# EAGLE board schematicamitfix_layout2 (EAGLE 8.4.1)
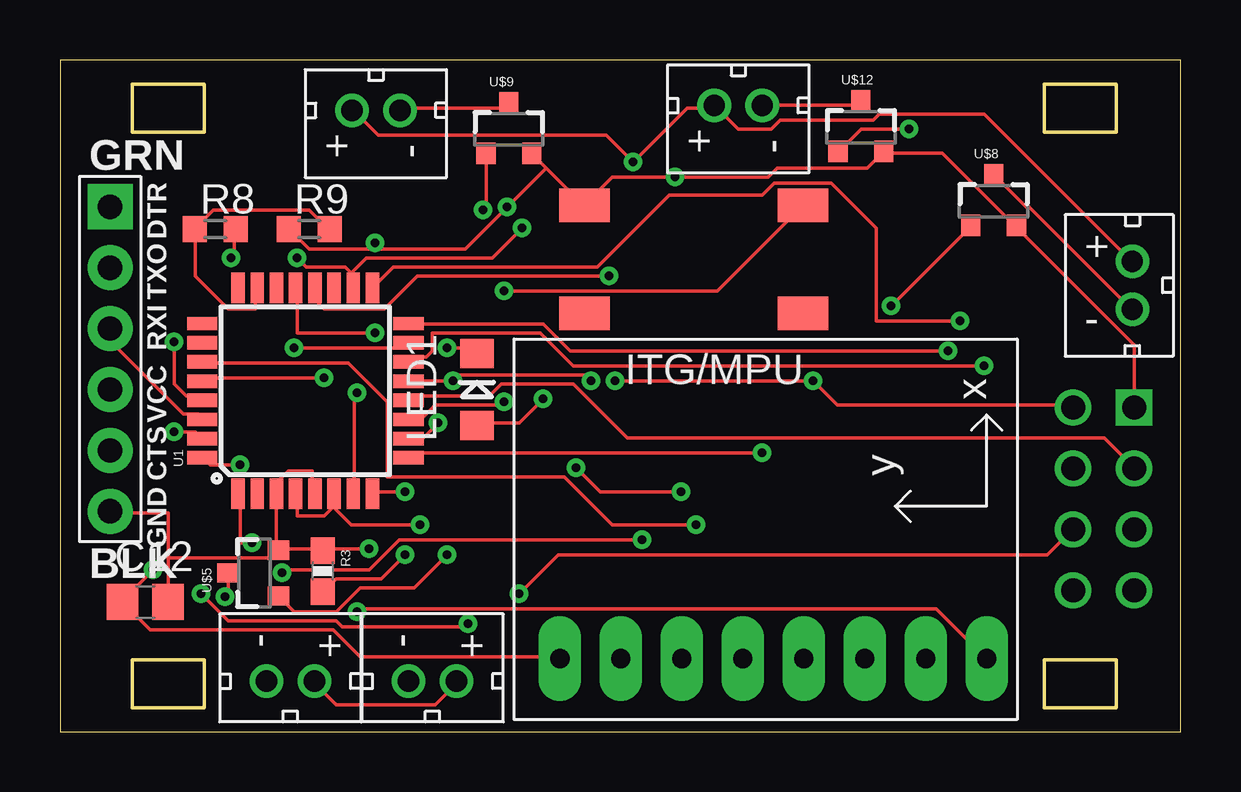
[diagram p0: board, top side]
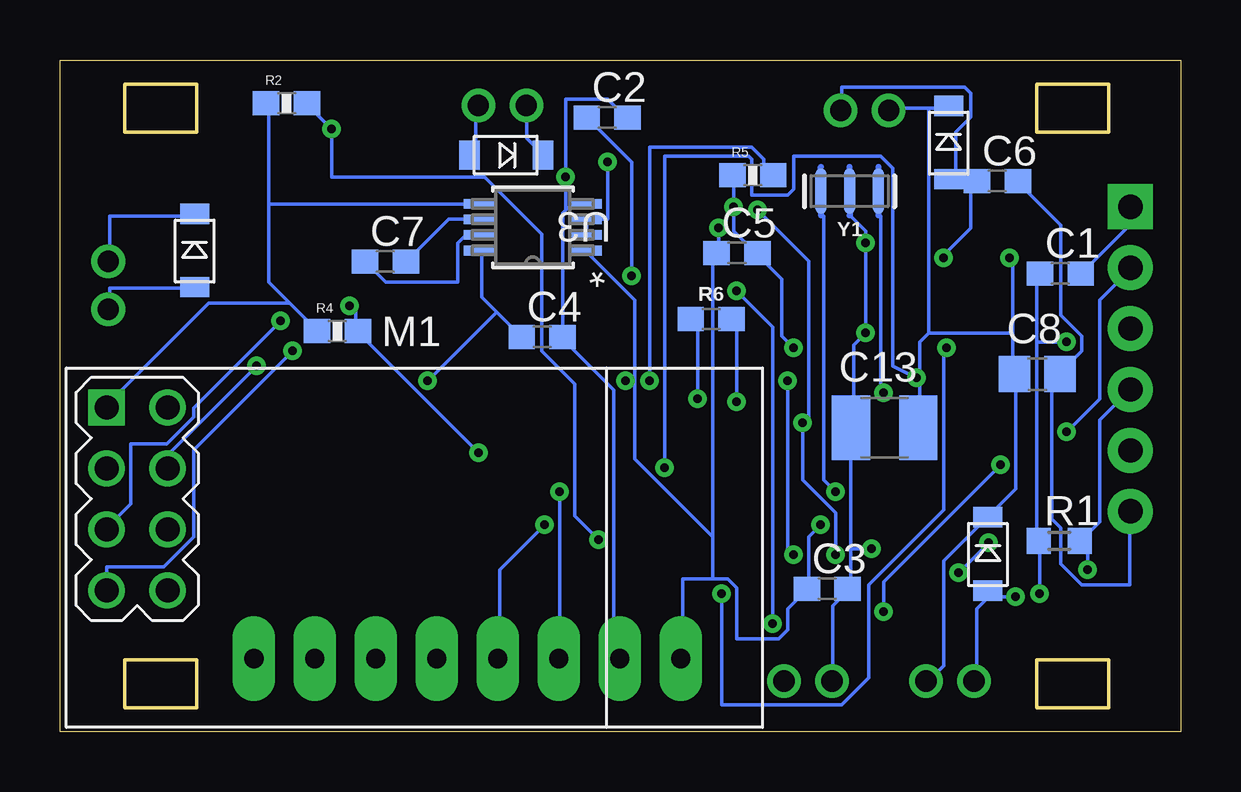
[diagram p1: board, bottom side, seen from below]

Size 46.69 x 28 mm. Coordinates in mm from the lower left corner, seen from the top.
Outline: 0,0 46.69,0 46.69,28 0,28 0,0
Outline: 3,1 3,3 6,3 6,1 3,1
Outline: 3,27 6,27 6,25 3,25 3,27
Outline: 44,1 41,1 41,3 44,3 44,1
Outline: 44,27 41,27 41,25 44,25 44,27
Copper layers (1*16): Top 0.035mm / dielectric 1.5mm / Bottom 0.035mm
Design rules "default": minimum track width 6mil, minimum drill 0.35mm, track to track 6mil, track to pad 6mil, pad to pad 6mil, via to via 6mil, smd to smd 6mil, copper to edge 40mil, drill to drill 6mil, minimum pad ring 10mil, minimum via ring 8mil, stop-mask expansion 4mil, vias tented up to drill 0mil, thermal gap 10mil

## Footprints (pad centres in the part's own frame; a part is rotated, then mirrored left to right if it is on the bottom)
C0603 = smd 1.1 x 1: 1 -0.85,0; 2 0.85,0
C0805 = smd 1.3 x 1.5: 1 -0.95,0; 2 0.95,0
C1210 = smd 1.6 x 2.7: 1 -1.4,0; 2 1.4,0
FTDI_DEVICE_SIDE = drill 1.016 pad 1.88 square: P$1 -6.35,0 | drill 1.016 pad 1.88: P$2 -3.81,0; P$3 -1.27,0; P$4 1.27,0; P$5 3.81,0; P$6 6.35,0
LED-1206 = smd 1.2 x 1.4: A -1.5,0; C 1.5,0
WIRELESS-NRF24L01 = drill 1 square: 1 -12.7,6.35 | drill 1: 2 -10.16,6.35; 3 -12.7,3.81; 4 -10.16,3.81; 5 -12.7,1.27; 6 -10.16,1.27; 7 -12.7,-1.27; 8 -10.16,-1.27
R0603 = smd 1 x 1.1: 1 -0.85,0; 2 0.85,0
0603-RES = smd 1.1 x 1: 1 -0.85,0; 2 0.85,0
0603 = smd 1.1 x 1: 1 -0.85,0; 2 0.85,0
TQFP32-08 = smd 1.27 x 0.559: 1 -4.293,2.8; 2 -4.293,2; 3 -4.293,1.2; 4 -4.293,0.4; 5 -4.293,-0.4; 6 -4.293,-1.2; 7 -4.293,-2; 8 -4.293,-2.8; 17 4.293,-2.8; 18 4.293,-2; 19 4.293,-1.2; 20 4.293,-0.4; 21 4.293,0.4; 22 4.293,1.2; 23 4.293,2; 24 4.293,2.8 | smd 0.559 x 1.27: 9 -2.8,-4.293; 10 -2,-4.293; 11 -1.2,-4.293; 12 -0.4,-4.293; 13 0.4,-4.293; 14 1.2,-4.293; 15 2,-4.293; 16 2.8,-4.293; 25 2.8,4.293; 26 2,4.293; 27 1.2,4.293; 28 0.4,4.293; 29 -0.4,4.293; 30 -1.2,4.293; 31 -2,4.293; 32 -2.8,4.293
GY-521 = drill 0.8 pad 1.778 long: ADO -8.89,-6.35; GND -8.89,6.35; INT -8.89,-8.89; SCL -8.89,3.81; SDA -8.89,1.27; VCC -8.89,8.89; XCL -8.89,-3.81; XDA -8.89,-1.27
21-0036K = smd 1.372 x 0.406: 1 -2.184,0.975; 2 -2.184,0.325; 3 -2.184,-0.325; 4 -2.184,-0.975; 5 2.184,-0.975; 6 2.184,-0.325; 7 2.184,0.325; 8 2.184,0.975
LL3301NF065QG = smd 2.1 x 1.4: 1 0,0; 2 0,-4.5; 3 9.1,0; 4 9.1,-4.5
JST_CONNECTOR_FEMALE = drill 0.889: + 0,1; - 0,-1
MINI2-F3-B = smd 1.22 x 0.85: NEG 0,1.55; POS 0,-1.5
SOT23-3 = smd 0.8 x 0.9: 1 -0.95,-1; 2 0.95,-1; 3 0,1.1
RESONATOR-SMD-3.2X1.3 = smd 0.45 x 1.905: 1 -1.2,0; 2 0,0; 3 1.2,0

## Placement (x,y rotation side)
C1  100nF  [C0603]  5.01,19.1 0 bottom
C2  100nF  [C0603]  23.89,25.6 0 bottom
C3  100nF  [C0603]  14.72,5.95 0 bottom
C4  100nF  [C0603]  26.6,16.45 0 bottom
C5  100nF  [C0603]  18.48,19.95 0 bottom
C6  10uF  [C0603]  7.63,22.95 0 bottom
C7  0.22uF  [C0603]  33.13,19.6 0 bottom
C8  1uF  [C0805]  5.97,14.9 0 bottom
C12  1uF  [C0805]  3.55,5.4 0 top
C13  100uF  [C1210]  12.33,12.67 0 bottom
J1  FTDI_DEVICE  [FTDI_DEVICE_SIDE]  2.09,15.53 270 top
LED1  [LED-1206]  17.37,14.26 90 top
M1  WIRELESS-NRF24L01  [WIRELESS-NRF24L01]  32.05,7.16 0 bottom
R1  10k  [R0603]  5.05,7.95 0 bottom
R2  10k  [0603-RES]  37.25,26.19 0 bottom
R3  10k  [0603-RES]  10.94,6.69 270 top
R4  10k  [0603-RES]  35.13,16.69 0 bottom
R5  10k  [0603-RES]  17.82,23.19 0 bottom
R6  220  [0603]  19.56,17.19 0 bottom
R8  10k  [R0603]  6.47,20.95 0 top
R9  10k  [R0603]  10.39,20.95 0 top
U1  ATMEGA328P_TQFP  [TQFP32-08]  10.22,14.21 90 top
U2  GY-521MPU6050  [GY-521]  29.72,11.93 90 top
U3  MAX1595EUA33+  [21-0036K]  26.99,21.03 180 bottom
U$1  LL3301NF065QG  [LL3301NF065QG]  21.86,21.94 0 top
U$3  JST_CONNECTOR_FEMALE  [JST_CONNECTOR_FEMALE]  13.16,25.9 90 top
U$4  DB2W40300L  [MINI2-F3-B]  9.66,24.53 0 bottom
U$5  N-CHANNEL-MOSFET-IRLML6244TRPBF  [SOT23-3]  8.1,6.61 90 top
U$6  DB2W40300L  [MINI2-F3-B]  28.12,24.03 270 bottom
U$7  JST_CONNECTOR_FEMALE  [JST_CONNECTOR_FEMALE]  28.26,26.1 90 top
U$8  N-CHANNEL-MOSFET-IRLML6244TRPBF  [SOT23-3]  38.9,22.11 0 top
U$9  N-CHANNEL-MOSFET-IRLML6244TRPBF  [SOT23-3]  18.7,25.11 0 top
U$10  DB2W40300L  [MINI2-F3-B]  41.08,20.03 0 bottom
U$11  JST_CONNECTOR_FEMALE  [JST_CONNECTOR_FEMALE]  44.68,18.6 0 top
U$12  N-CHANNEL-MOSFET-IRLML6244TRPBF  [SOT23-3]  33.37,25.19 0 top
U$14  DB2W40300L  [MINI2-F3-B]  8.03,7.38 0 bottom
U$15  JST_CONNECTOR_FEMALE  [JST_CONNECTOR_FEMALE]  9.6,2.1 270 top
U$19  JST_CONNECTOR_FEMALE  [JST_CONNECTOR_FEMALE]  15.52,2.1 270 top
Y1  8MHz  [RESONATOR-SMD-3.2X1.3]  13.79,22.53 180 bottom

## Library data of the parts
C1-C8 C12 C13 = rcl; SPICEPREFIX: C
J1 M1 U2 U$3 U$4 U$6 U$7 U$10 U$11 U$14 U$15 U$19 = quad
LED1 = LilyPad-Wearables
R1 R8 R9 = rcl; SPICEPREFIX: R
R2-R5 = SparkFun-Resistors
R6 = SparkFun-Resistors; PROD_ID: RES-07861
U1 = quad; PROD_ID: IC-09069
U3 = MAX1595EUA33+; MANUFACTURER_PART_NUMBER: MAX1595EUA33+; VENDOR: Maxim Integrated Products
U$1 = E-Switch
U$5 U$8 U$9 U$12 = quad; DATASHEET: http://www.mouser.com/ds/2/196/irlml6244pbf-936666.pdf; MOUSER: 942-IRLML6244TRPBF; URL: http://www.mouser.com/Search/ProductDetail.aspx?R=IRLML6244TRPBFvirtualkey57370000virtualkey942-IRLML6244TRPBF
Y1 = SparkFun-Clocks; PROD_ID: XTAL-08895

## Nets
AIN: R8.1 R9.2 U1.23
FTDI_DTR: C1.2 J1.P$1
FTDI_RX: J1.P$3 U1.30
FTDI_TX: J1.P$2 U1.31
GND: C2.2 C3.2 C4.2 C5.2 C6.2 C8.2 C12.2 C13.1 J1.P$6 LED1.C M1.1 R2.1 R3.1 R4.1 R5.1 R9.1 U1.3 U1.5 U1.21 U2.GND U3.4 U3.5 U$1.1 U$5.2 U$8.2 U$9.2 U$12.2 U$19.- Y1.2
IMU_INT: U1.32 U2.INT
IMU_SCL: U1.28 U2.SCL
IMU_SDA: U1.27 U2.SDA
N$1: C1.1 R1.1 U1.29 U$1.3
N$2: C2.1 U1.20
N$5: U$3.- U$4.POS U$9.3
N$6: C7.1 U3.7
N$7: R6.2 U1.11
N$9: U$6.POS U$7.- U$12.3
N$10: C7.2 U3.6
N$11: LED1.A R6.1
N$13: U$8.3 U$10.POS U$11.-
N$17: U$5.3 U$14.POS U$15.-
NRF_CE: M1.3 U1.12
NRF_CSN: M1.4 U1.14
NRF_MISO: M1.7 U1.16
NRF_MOSI: M1.6 U1.15
NRF_SCK: M1.5 U1.17
PWM1: R2.2 U1.1 U$12.1
PWM2: R3.2 U1.10 U$9.1
PWM3: R4.2 U1.9 U$8.1
PWM4: R5.2 U1.13 U$5.1
VCC: C3.1 C4.1 C5.1 C6.1 C12.1 J1.P$4 M1.2 R1.2 U1.4 U1.6 U1.18 U2.VCC U3.1 U3.8
VIN: C8.1 C13.2 R8.2 U3.2 U3.3 U$3.+ U$4.NEG U$6.NEG U$7.+ U$10.NEG U$11.+ U$14.NEG U$15.+ U$19.+
XTAL1: U1.7 Y1.1
XTAL2: U1.8 Y1.3

## Tracks (layer width: path | path; a pad name or v marks a point on that pad's centre or on a via)
AIN
  Top 0.152: R9.2 11.12,21 10.38,21.75 6.38,21.75 5.62,21 R8.1 5.62,20.88 5.62,19 7,17.62 8.12,17.62 8.12,18.5 U1.23
FTDI_DTR
  Bottom 0.152: C1.2 4.12,19.12 2.12,21.12 2.12,21.88 J1.P$1
FTDI_RX
  Top 0.152: U1.30 5.88,13.12 5.75,13.25 5.12,13.25 2.12,16.25 2.12,16.75 J1.P$3
FTDI_TX  (via drill 0.35)
  Top 0.152: v4.75,12.5 5.62,12.5 5.88,12.25 U1.31
  Bottom 0.152: v4.75,12.5 3.38,13.88 3.38,18 2.12,19.25 J1.P$2
GND  (via drill 0.35)
  Top 0.152: U$5.2 9.12,7.62 10.88,7.62 R3.1 11,7.62 v12.88,7.62 | U$5.2 9,7.62 9,9.88 U1.3 9.12,10 9.12,10.5 9.5,10.88 10.5,10.88 10.5,10 U1.5 | 4.5,7.25 4.5,9.12 2.12,9.12 J1.P$6 | 4.5,7.25 C12.2 | 4.5,7.25 8.75,7.25 9,7.5 U$5.2 | v13.12,16.62 9.88,16.62 9.88,18.5 U1.21 | v16.12,16 17.12,16 17.25,15.88 LED1.C | 20.25,23.5 21.75,22 U$1.1 21.88,22 23,23.12 v25.62,23.12 29.5,23.12 29.88,23.5 33.62,23.5 34.25,24.12 U$12.2 34.38,24.12 36.75,24.12 39.75,21.12 U$8.2 39.88,21 44.75,16.12 M1.1 | 20.25,23.5 19.75,24 U$9.2 | 13.12,20.12 16.88,20.12 v18.62,21.88 20.25,23.5 | 13.12,20.12 10.38,20.12 9.62,20.88 R9.1 | 13.12,20.12 v13.12,20.38
  Bottom 0.152: C6.2 6.75,22.88 5,21.12 5,17.38 4.12,16.5 4.12,15.88 5,15 C8.2 5.12,14.88 5.38,14.62 5.38,8.88 5,8.5 5,7 4.12,6.12 2.12,6.12 2.12,9.12 J1.P$6 | 25.62,21.75 25.38,22 24.88,22 U3.4 | 25.62,21.75 25.75,21.62 C4.2 25.75,16.38 23.62,14.25 23.62,3.38 23.38,3.12 U2.GND | 25.62,21.75 v25.62,23.12 25.62,26.38 23.88,26.38 23.12,25.62 C2.2 | U$19.- 14.5,2.12 14.5,5.25 13.88,5.88 C3.2 13.75,6 13.75,7.62 | 13.79,21.51 13.75,21.5 13.12,20.88 v13.12,20.38 v13.12,16.62 13.62,16.12 13.62,12.75 C13.1 13.75,12.62 13.75,7.62 | R5.1 18.62,23.12 v18.62,21.88 18.62,20.88 17.75,20 C5.2 17.62,19.88 16.62,18.88 16.62,16.5 v16.12,16 | 37.12,17.88 38,18.75 38,22 | 37.12,17.88 36,16.75 R4.1 | 38,22 38,26.12 R2.1 | 38,22 29.25,22 U3.5 | 37.12,17.88 40.5,17.88 44.75,13.62 M1.1 | 13.75,7.62 v12.88,7.62
IMU_INT  (via drill 0.35)
  Top 0.152: v7.5,11.12 6.25,11.12 6,11.38 U1.32 | v12.38,5 12.5,5.12 36.5,5.12 38.5,3.12 U2.INT
  Bottom 0.152: v7.5,11.12 12.38,6.25 v12.38,5
IMU_SCL  (via drill 0.35)
  Top 0.152: v11,14.75 6.12,14.75 6,14.62 U1.28 | v21.5,11 22.5,10 v25.88,10
  Bottom 0.152: v11,14.75 12,15.25 12,23.5 12.5,24 16.12,24 16.12,22.62 16.38,22.38 17.88,22.38 17.88,23.88 18,24 21.5,24 v21.5,11 | v25.88,10 25.88,3.12 U2.SCL
IMU_SDA  (via drill 0.35)
  Top 0.152: v26.5,8.62 23,8.62 21,10.62 13.62,10.62 13.62,13.75 12,15.38 6,15.38 U1.27
  Bottom 0.152: v26.5,8.62 28.38,6.75 28.38,3.12 U2.SDA
N$1  (via drill 0.35)
  Top 0.152: v4.75,16.25 4.75,14.5 5.25,14 5.75,14 5.88,13.88 U1.29 | v18.5,18.38 27.38,18.38 30.88,21.88 U$1.3 | v17,4.5 16.88,4.38 11.75,4.38 11.5,4.62 7,4.62 v5.88,5.75
  Bottom 0.152: 6,16.25 6,18.88 5.88,19 C1.1 | 6,16.25 6,8 R1.1 5.88,7.88 v5.88,5.75 | 6,16.25 v4.75,16.25 | v18.5,18.38 17,16.88 v17,4.5
N$2  (via drill 0.35)
  Top 0.152: v22.88,19 14.88,19 13.5,17.62 11,17.62 10.62,18 U1.20
  Bottom 0.152: v22.88,19 22.88,23.75 24.62,25.5 C2.1
N$5
  Top 0.152: U$9.3 18.62,26.12 18.5,26 14.25,26 U$3.-
  Bottom 0.152: U$4.POS 9.62,23.12 9.38,23.38 9.38,25 8.75,25.62 8.75,26.62 9,26.88 14.12,26.88 14.12,26 U$3.-
N$6
  Bottom 0.152: C7.1 33.88,19.5 33.12,18.75 30.12,18.75 30.12,20.38 29.88,20.62 29.25,20.62 U3.7
N$7  (via drill 0.35)
  Top 0.152: v18.5,13.75 18.38,13.62 15.62,13.62 15.12,13.12 14.62,13.12 U1.11
  Bottom 0.152: v18.5,13.75 18.5,17 18.62,17.12 R6.2
N$9
  Top 0.152: U$12.3 33.25,26.25 33.12,26.12 29.38,26.12 U$7.-
  Bottom 0.152: U$6.POS 29.5,24.12 29.38,24.25 29.38,26 U$7.-
N$10
  Bottom 0.152: C7.2 32.25,19.62 30.5,21.38 29.25,21.38 U3.6
N$11  (via drill 0.35)
  Top 0.152: v20.12,13.88 19.12,12.88 17.38,12.88 LED1.A
  Bottom 0.152: v20.12,13.88 20.12,16.88 20.38,17.12 R6.1
N$13
  Top 0.152: U$8.3 39,23.12 40.25,21.88 40.38,21.88 44.62,17.62 U$11.-
  Bottom 0.152: U$10.POS 41.12,18.5 44.62,18.5 44.62,17.62 U$11.-
N$17  (via drill 0.35)
  Top 0.152: U$5.3 7,5.62 v6.88,5.62
  Bottom 0.152: 8,5.62 v6.88,5.62 | 8,5.62 8,5.88 U$14.POS 8,5.62 | 8,5.62 8.5,5.12 8.5,2.12 U$15.-
NRF_CE
  Top 0.152: U1.12 14.62,13.88 14.75,14 17.88,14 18.38,14.5 21.38,14.5 23.62,12.25 43.5,12.25 44.75,11 M1.3
NRF_CSN  (via drill 0.35)
  Top 0.152: v38.5,15.25 21.38,15.25 20,16.62 15.5,16.62 15.5,15.88 15.25,15.62 14.75,15.62 14.62,15.5 U1.14
  Bottom 0.152: v38.5,15.25 42.12,11.62 42.12,11 M1.4
NRF_MISO  (via drill 0.35)
  Top 0.152: v37,15.88 21.25,15.88 20.12,17 14.62,17 U1.16
  Bottom 0.152: v37,15.88 41.12,11.75 41.12,8.12 42.38,6.88 44.75,6.88 M1.7
NRF_MOSI  (via drill 0.35)
  Top 0.152: v9.75,16 14.38,16 14.5,16.12 U1.15 | v19.12,5.75 20.75,7.38 41.12,7.38 42.12,8.38 M1.6
  Bottom 0.152: v9.75,16 9.88,15.62 9.88,9.25 13,6.12 13,2.25 14.12,1.12 19.12,1.12 v19.12,5.75
NRF_SCK  (via drill 0.35)
  Top 0.152: v37.5,17.12 34,17.12 34,21 32.12,22.88 29.75,22.88 29.25,22.38 25.38,22.38 22.38,19.38 13.88,19.38 13.12,18.62 U1.17
  Bottom 0.152: v37.5,17.12 41.12,13.5 41.12,13.12 42.25,12 43.75,12 43.75,9.5 44.75,8.5 M1.5
PWM1  (via drill 0.35)
  Top 0.152: v35.38,25.12 33.38,25.12 32.5,24.25 U$12.1 | v8,7.88 7.5,7.88 7.5,9.88 U1.1 | v9.25,6.62 9.38,6.75 12.88,6.75 14.12,8 v24.25,8
  Bottom 0.152: R2.2 36.38,26.12 v35.38,25.12 35.38,23.12 29,23.12 26.62,20.75 26.62,15.88 25.25,14.5 25.25,9 v24.25,8 | v9.25,6.62 v8,7.88
PWM2  (via drill 0.35)
  Top 0.152: U$9.1 17.75,21.75 v17.62,21.75 | v15.75,12.88 15.12,12.25 14.62,12.25 U1.10 | v14.38,7.38 13.38,6.38 11.5,6.38 11,5.88 R3.2
  Bottom 0.152: v17.62,21.75 15.5,19.62 15.5,13.12 v15.75,12.88 15.75,10.5 14.38,9.12 v14.38,7.38
PWM3  (via drill 0.35)
  Top 0.152: v34.62,17.75 37.88,21 U$8.1 | v29.25,11.62 14.75,11.62 14.62,11.5 U1.9
  Bottom 0.152: v34.62,17.75 34.38,17.5 34.38,16.75 R4.2 34.25,16.62 v29.25,11.62
PWM4  (via drill 0.35)
  Top 0.152: v16.12,7.38 14.75,6 12.5,6 11.5,5 9.75,5 9.12,5.62 U$5.1 | U1.13 14.62,14.62 v16.38,14.62 16.62,14.88 21.88,14.88 v22.12,14.62
  Bottom 0.152: v16.12,7.38 16.38,7.62 v16.38,14.62 | v22.12,14.62 22.12,24.38 17.88,24.38 17.38,23.88 17.38,23.62 17,23.25 R5.2
VCC  (via drill 0.35)
  Top 0.152: M1.2 42.12,13.62 32.38,13.62 v31.38,14.62 v23.12,14.62 | v9.88,19.75 10.25,19.38 11.88,19.38 12.12,19.12 | 12.12,19.12 12.12,18.62 U1.18 12.12,19.12 | 11.38,9.38 11,9 9.88,9 9.88,9.88 U1.4 | 11.38,9.38 11.38,9.88 U1.6 11.38,9.38 | U2.VCC 20.75,3.12 12.5,3.12 11.38,4.25 3.75,4.25 C12.1 2.62,5.5 v3.88,6.75 | 11.38,9.38 12.12,8.62 v15,8.62 | 12.12,19.12 12.75,19.75 18,19.75 v19.25,21
  Bottom 0.152: 28.5,17.5 29.12,18.12 29.12,20 U3.8 | 28.5,17.5 C4.1 | v31.38,14.62 28.5,17.5 | J1.P$4 2.12,14.25 3.38,13 3.38,8.75 4.12,8 R1.2 3.88,7.62 v3.88,6.75 | v9.88,19.75 9.88,19.88 8.75,21 8.75,22.62 8.5,22.88 C6.1 | 19.5,6.38 20.75,6.38 20.75,3.12 U2.VCC | 19.5,6.38 18.88,6.38 18.5,6 18.5,3.88 16.75,3.88 16.38,4.25 16.38,5.12 15.62,5.88 C3.1 15.5,6 15.5,8.12 v15,8.62 | 19.5,6.38 19.5,8.12 | 19.5,8.12 19.5,19.75 19.38,19.88 C5.1 19.25,20 v19.25,21 | 22.75,14.62 22.75,11.38 19.5,8.12 | 22.75,14.62 22.75,18 24.75,20 U3.1 | 22.75,14.62 v23.12,14.62
VIN  (via drill 0.35)
  Top 0.152: U$11.+ 44.62,19.62 38.5,25.75 34.12,25.75 33.88,25.5 30,25.5 29.62,25.12 28.25,25.12 27.38,26 U$7.+ 27.25,26 26.12,26 v23.88,23.75 22.75,24.88 13.25,24.88 12.25,25.88 U$3.+ | U$15.+ 10.62,2 11.5,1.12 15.62,1.12 16.5,2 U$19.+ | v7.12,19.75 7.25,19.75 7.25,20.88 R8.2
  Bottom 0.152: U$10.NEG 41.12,21.5 44.62,21.5 44.62,19.62 U$11.+ | U3.2 24.75,20.75 24.75,21.25 U3.3 24.75,21.38 23.88,21.38 v23.88,23.75 | U$6.NEG 26.62,24.12 27.25,24.75 27.25,26 U$7.+ | 10.5,26 12.12,26 U$3.+ | 10.5,26 9.75,26 U$4.NEG | v7.12,19.75 7,19.62 7,16.62 | 7,16.62 7,15 C8.1 6.88,14.88 6.88,10.12 8,9 U$14.NEG 8.12,8.88 9.88,7.12 9.88,2.75 10.5,2.12 U$15.+ | 10.5,16.62 10.88,16.25 10.88,12.75 C13.2 | 7,16.62 10.5,16.62 | 10.5,16.62 10.5,26
XTAL1  (via drill 0.35)
  Top 0.152: v12.38,14.12 12.25,14.12 12.25,10 U1.7
  Bottom 0.152: v12.38,14.12 12.5,14.25 12.5,21.5 12.59,21.51
XTAL2  (via drill 0.35)
  Top 0.152: v14.38,10 13.12,10 U1.8
  Bottom 0.152: v14.38,10 14.88,10.5 14.88,21.5 14.99,21.51